# Altium PCB PCB1.PcbDoc
Units mil, origin at the board's own origin, x right, y up, seen from the top; angles counter-clockwise.
Board outline 6000 x 4000 mil, 2 copper layers (Top Layer, Bottom Layer); 38 components, 55 nets, 218 pads, 10 vias.
Unrouted connection lines stored in the file: 1.
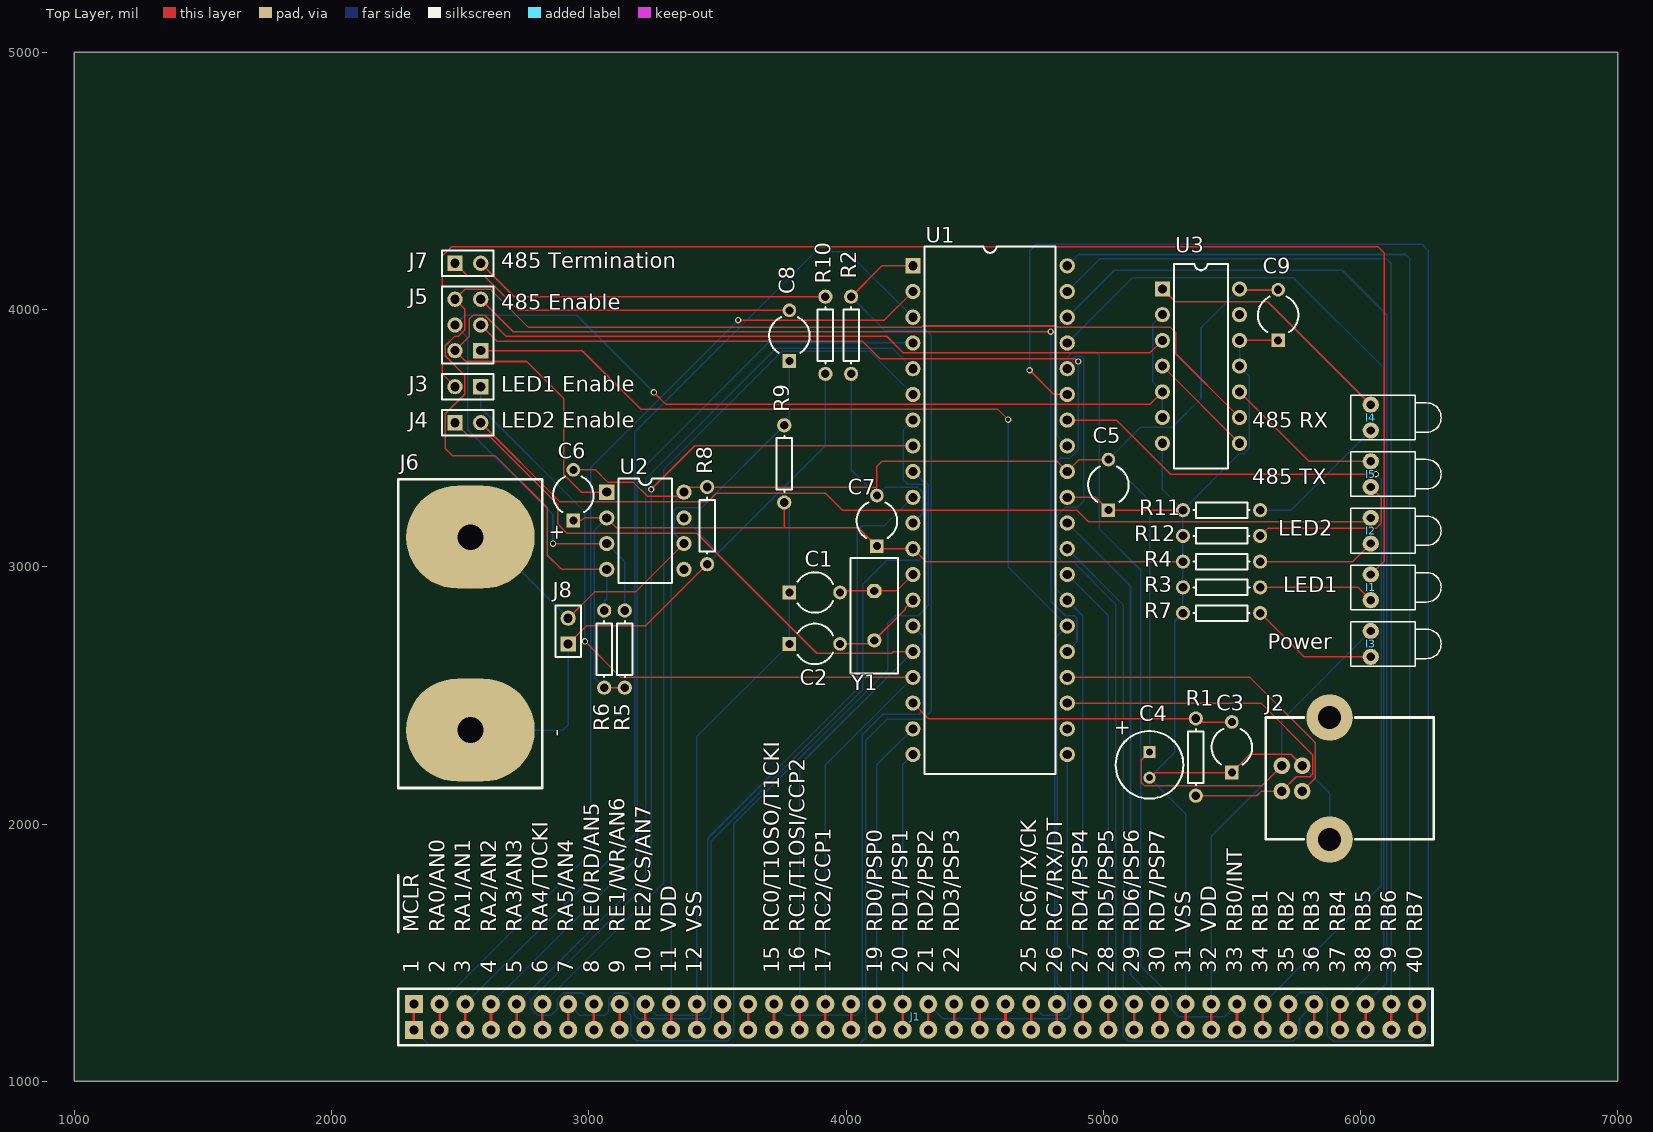
[diagram p0: Top Layer view]
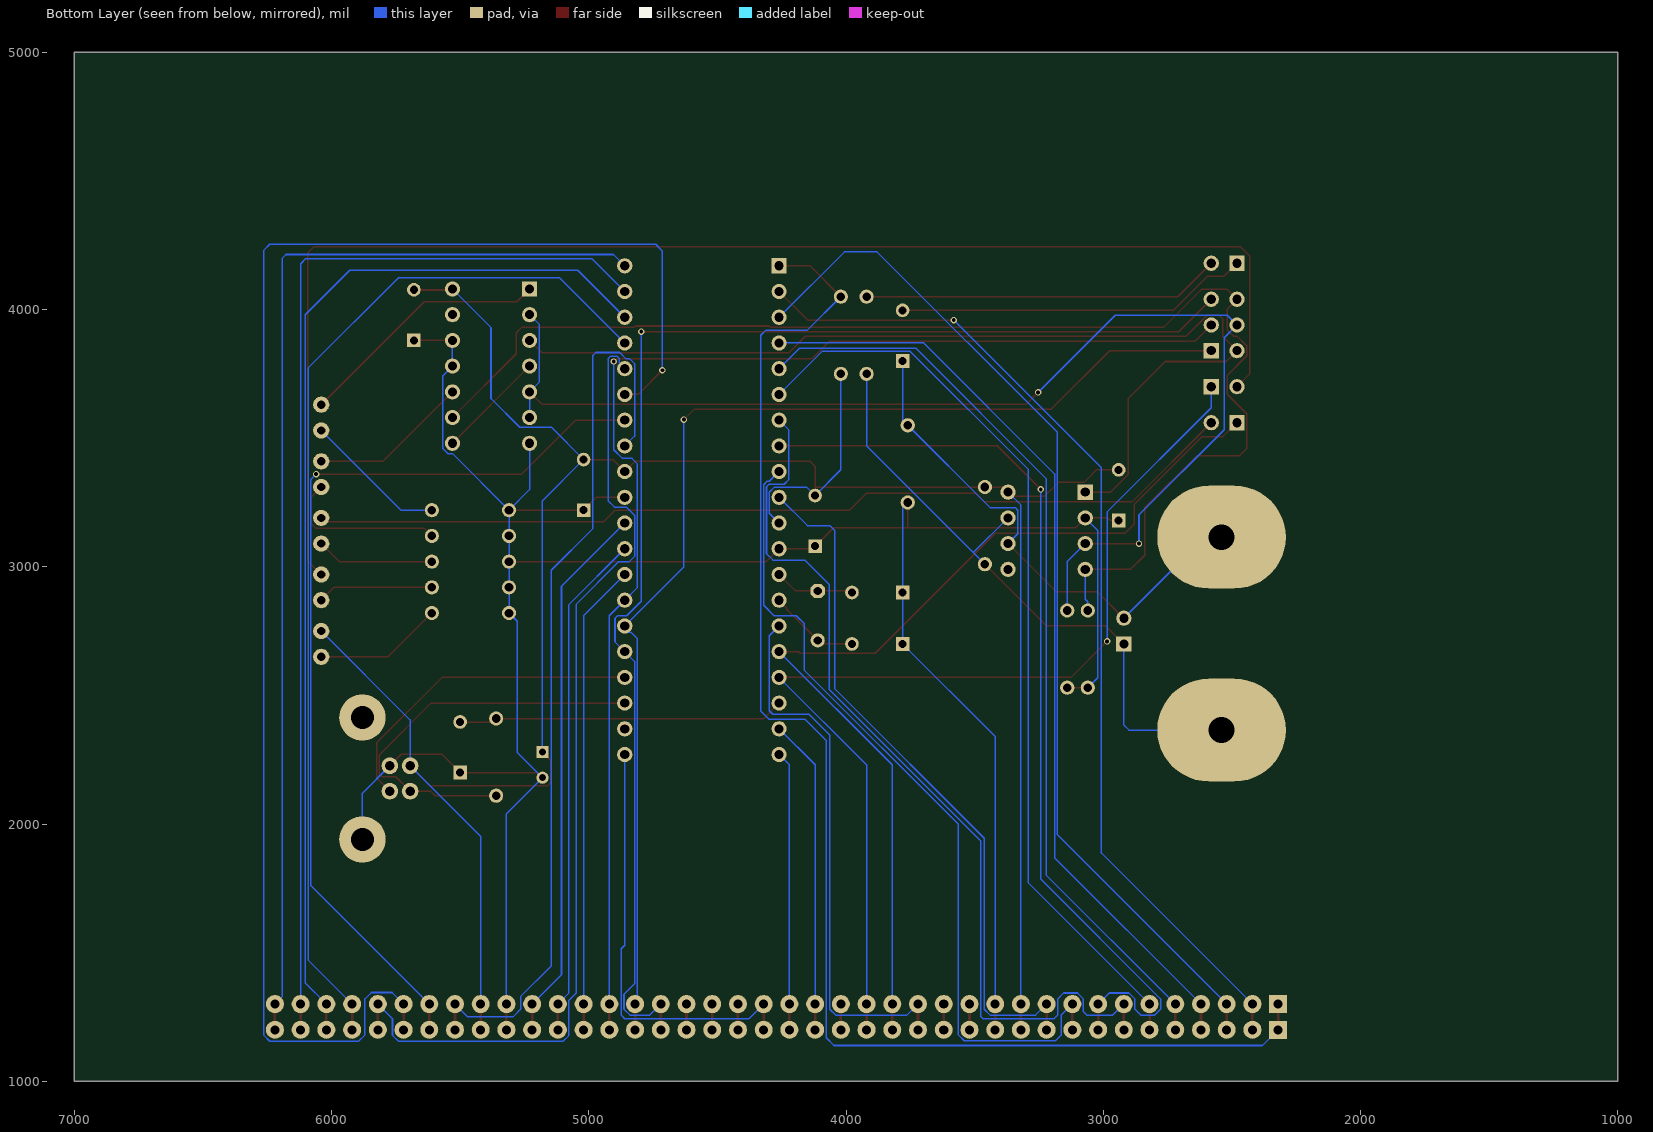
[diagram p1: Bottom Layer view, seen from below]

## Layer stack, top to bottom
Top Layer: signal copper 1.4
Dielectric: dielectric 12.6, FR-4, Dk 4.8
Bottom Layer: signal copper 1.4

## Board outline
1000,1000 7000,1000 7000,5000 1000,5000

## Design rules (kind name [scope] priority, off if disabled: settings)
Clearance [All] p1: gap=5
ComponentClearance [All] p1: gap=10 collisioncheckmode=0
PolygonConnect [All] p1: connectstyle=Relief reliefconductorwidth=10 reliefentries=4 polygonreliefangle="90 Angle"
RoomDefinition Sheet1 [InComponentClass('Sheet1')] p1: confinementstyle=ConfineIn formatcopy=TRUE outline 0,0 2000,0 2000,1000 0,1000
RoutingLayers [All] p1: top layer=Horizontal bottom layer=Vertical
RoutingVias [All] p1: holewidth=15 width=25 viastyle="Through Hole" minholewidth=15 minwidth=25 maxholewidth=15 maxwidth=25
SolderMaskExpansion [All] p1: expansion=4
TestPointUsage [All] p1: valid=0 allowmultiple=FALSE
Testpoint [All] p1: side=15 testpointundercomponent=TRUE minsize=40 maxsize=100 preferedsize=60 minholesize=0 maxholesize=40 preferedholesize=32 testpointgrid=1 style=1023 order=1234567890
Width Width_power [(InNet('VCC') or InNet('GND'))] p1: maxlimit=20 minlimit=10 preferedwidth=10 toplayer_minwidth=20 toplayer_prefwidth=20 bottomlayer_minwidth=20 bottomlayer_prefwidth=20 minimp=50.000000 maximp=50.000000 favimp=50.000000
Width [All] p2: maxlimit=10 minlimit=5 preferedwidth=10 toplayer_maxwidth=6 toplayer_prefwidth=6 bottomlayer_maxwidth=6 bottomlayer_prefwidth=6 minimp=50.000000 maximp=50.000000 favimp=50.000000
16 further rules are at their usual default settings.

## Components (designator, comment, footprint, x,y, rotation, side; value= is the part's Value field where it differs from the comment)
C1 "Cap2" CAPR5-4X5 3780,2900 r0 top
C2 "Cap2" CAPR5-4X5 3780,2700 r0 top
C3 "" CAPR5-4X5 5500,2200 r90 top
C4 "10uF" CAP-EE-1 5180,2380 r90 top
C5 "" CAPR5-4X5 5020,3220 r90 top
C6 "" CAPR5-4X5 2940,3180 r90 top
C7 "" CAPR5-4X5 4120,3080 r90 top
C8 "" CAPR5-4X5 3780,3800 r90 top
C9 "" CAPR5-4X5 5680,3880 r90 top
I1 "LED1" LED-1 6040,2920 r0 top
I2 "LED2" LED-1 6040,3140 r0 top
I3 "Power" LED-1 6040,2700 r0 top
I4 "485 RX" LED-1 6040,3580 r0 top
I5 "485 TX" LED-1 6040,3360 r0 top
J1 "GPIO" HR40 2320,1200 r90 top (schematic designator JP1)
J2 "USB" USB-TYPEB 5880,1940 r90 top (schematic designator J1)
J3 "LED1 Enable" HDR1X2 2580,3700 r180 top
J4 "LED2 Enable" HDR1X2 2480,3560 r0 top
J5 "485 Enable" HDR2X3_NOTEXT 2580,3840 r90 top
J6 "RS-485" RS485J 2540,2740 r90 top
J7 "485 Termination" HDR1X2 2480,4180 r0 top
J8 "RS-485" HDR1X2 2920,2700 r90 top
R1 "Res1" AXIAL-0.3 5360,2260 r270 top
R2 "Res1" AXIAL-0.3 4020,3900 r270 top
R3 "Res1" AXIAL-0.3 5460,2920 r180 top
R4 "Res1" AXIAL-0.3 5460,3020 r180 top
R5 "Res1" AXIAL-0.3 3140,2680 r90 top
R6 "Res1" AXIAL-0.3 3060,2680 r90 top
R7 "" AXIAL-0.3 5460,2820 r180 top
R8 "" AXIAL-0.3 3460,3160 r270 top
R9 "" AXIAL-0.3 3760,3400 r270 top
R10 "" AXIAL-0.3 3920,3900 r270 top
R11 "" AXIAL-0.3 5460,3220 r180 top
R12 "" AXIAL-0.3 5460,3120 r180 top
U1 "PIC16C765" DIP-40 4560,3220 r270 top
U2 "MAX3082E" DIP-8 3220,3140 r270 top
U3 "MM74C02J" DIP-14 5380,3780 r270 top
Y1 "6 MHz" BCY-W2/E4.7 4110,2810 r270 top

## Footprints (in the part's own frame and the unit in brackets; to place one, negate y for a bottom-side part, rotate by r counter-clockwise, add the part's x,y. Pads: shape width x height; smd on the part's side, far side on the other; paste and mask are expansions set on the pad)
AXIAL-0.3 [mm]
  round 1.4 hole 0.85: 1(-3.81,0) 2(3.81,0)
  silkscreen extent -2.77,-0.76 2.77,0.76
BCY-W2/E4.7 [mm]
  oct 1.4x1.4 hole 0.8: 1(-2.44,0)
  round 1.4 hole 0.8: 2(2.44,0)
  silkscreen extent -5.7,-2.35 5.7,2.35
CAP-EE-1 [mm]
  rect 1.2x1.2 hole 0.7: 1(-2.54,0)
  round 1.2 hole 0.7: 2(-5.08,0)
  silkscreen extent -7.15,-3.34 -0.47,3.34
CAPR5-4X5 [mm]
  rect 1.35x1.35 hole 0.8: 1(0,0)
  round 1.35 hole 0.8: 2(5,0)
  silkscreen extent 0.81,-2 4.32,2
DIP-8 [mm]
  rect 1.5x1.5 hole 0.9: 1(-3.81,-3.81)
  round 1.5 hole 0.9: 2(-1.27,-3.81) 3(1.27,-3.81) 4(3.81,-3.81) 5(3.81,3.81) 6(1.27,3.81) 7(-1.27,3.81) 8(-3.81,3.81)
  silkscreen extent -5.15,-2.65 5.15,2.65
DIP-14 [mm]
  rect 1.5x1.5 hole 0.9: 1(-7.62,-3.81)
  round 1.5 hole 0.9: 2(-5.08,-3.81) 3(-2.54,-3.81) 4(0,-3.81) 5(2.54,-3.81) 6(5.08,-3.81) 7(7.62,-3.81) 8(7.62,3.81) 9(5.08,3.81) 10(2.54,3.81) 11(0,3.81) 12(-2.54,3.81) 13(-5.08,3.81) 14(-7.62,3.81)
  silkscreen extent -10.1,-2.65 10.1,2.65
DIP-40 [mm]
  rect 1.5x1.5 hole 0.9: 1(-24.13,-7.62)
  round 1.5 hole 0.9: 2(-21.59,-7.62) 3(-19.05,-7.62) 4(-16.51,-7.62) 5(-13.97,-7.62) 6(-11.43,-7.62) 7(-8.89,-7.62) 8(-6.35,-7.62) 9(-3.81,-7.62) 10(-1.27,-7.62) 11(1.27,-7.62) 12(3.81,-7.62) 13(6.35,-7.62) 14(8.89,-7.62) 15(11.43,-7.62) 16(13.97,-7.62) 17(16.51,-7.62) 18(19.05,-7.62) 19(21.59,-7.62) 20(24.13,-7.62) 21(24.13,7.62) 22(21.59,7.62) 23(19.05,7.62) 24(16.51,7.62) 25(13.97,7.62) 26(11.43,7.62) 27(8.89,7.62) 28(6.35,7.62) 29(3.81,7.62) 30(1.27,7.62) 31(-1.27,7.62) 32(-3.81,7.62) 33(-6.35,7.62) 34(-8.89,7.62) 35(-11.43,7.62) 36(-13.97,7.62) 37(-16.51,7.62) 38(-19.05,7.62) 39(-21.59,7.62) 40(-24.13,7.62)
  silkscreen extent -26.05,-6.45 26.05,6.45
HDR1X2 [mm]
  rect 1.5x1.5 hole 0.9: 1(0,0)
  round 1.5 hole 0.9: 2(2.54,0)
  silkscreen extent -1.27,-1.27 3.81,1.27
HDR2X3_NOTEXT [mm]
  rect 1.5x1.5 hole 0.9: 1(0,0)
  round 1.5 hole 0.9: 2(0,2.54) 3(2.54,0) 4(2.54,2.54) 5(5.08,0) 6(5.08,2.54)
  silkscreen extent -1.27,-1.27 6.35,3.81
HR40 [mil]
  rect 70x70 hole 35: 1(0,0) 1(100,0)
  round 70 hole 35: 2(0,-100) 2(100,-100) 3(0,-200) 3(100,-200) 4(0,-300) 4(100,-300) 5(0,-400) 5(100,-400) 6(0,-500) 6(100,-500) 7(0,-600) 7(100,-600) 8(0,-700) 8(100,-700) 9(0,-800) 9(100,-800) 10(0,-900) 10(100,-900) 11(0,-1000) 11(100,-1000) 12(0,-1100) 12(100,-1100) 13(0,-1200) 13(100,-1200) 14(0,-1300) 14(100,-1300) 15(0,-1400) 15(100,-1400) 16(0,-1500) 16(100,-1500) 17(0,-1600) 17(100,-1600) 18(0,-1700) 18(100,-1700) 19(0,-1800) 19(100,-1800) 20(0,-1900) 20(100,-1900) 21(0,-2000) 21(100,-2000) 22(0,-2100) 22(100,-2100) 23(0,-2200) 23(100,-2200) 24(0,-2300) 24(100,-2300) 25(0,-2400) 25(100,-2400) 26(0,-2500) 26(100,-2500) 27(0,-2600) 27(100,-2600) 28(0,-2700) 28(100,-2700) 29(0,-2800) 29(100,-2800) 30(0,-2900) 30(100,-2900) 31(0,-3000) 31(100,-3000) 32(0,-3100) 32(100,-3100) 33(0,-3200) 33(100,-3200) 34(0,-3300) 34(100,-3300) 35(0,-3400) 35(100,-3400) 36(0,-3500) 36(100,-3500) 37(0,-3600) 37(100,-3600) 38(0,-3700) 38(100,-3700) 39(0,-3800) 39(100,-3800) 40(0,-3900) 40(100,-3900)
  Top Layer lines w10: 0,0 100,0 ; 0,-100 100,-100 ; 0,-200 100,-200 ; 0,-300 100,-300 ; 0,-400 100,-400 ; 0,-500 100,-500 ; 0,-600 100,-600 ; 0,-700 100,-700 ; 0,-800 100,-800 ; 0,-900 100,-900 ; 0,-1000 100,-1000 ; 0,-1200 100,-1200 ; 20,-1200 120,-1200 ; 0,-1400 100,-1400 ; -20,-1900 80,-1900 ; 20,-1900 120,-1900 ; 0,-1600 100,-1600 ; 0,-1600 100,-1600 ; 0,-1600 100,-1600 ; 0,-1600 100,-1600 ; 0,-1600 100,-1600 ; 0,-1700 100,-1700 ; 0,-1700 100,-1700 ; 0,-1700 100,-1700 ; 0,-1700 100,-1700 ; 0,-1700 100,-1700 ; 0,-1800 100,-1800 ; 0,-1800 100,-1800 ; 0,-1800 100,-1800 ; 0,-1800 100,-1800 ; 0,-1900 100,-1900 ; 0,-1900 100,-1900 ; 0,-1900 100,-1900 ; 0,-2000 100,-2000 ; 0,-2000 100,-2000 ; 0,-2000 100,-2000 ; 0,-2000 100,-2000 ; 0,-2100 100,-2100 ; 0,-2100 100,-2100 ; 0,-2100 100,-2100 ; 0,-2100 100,-2100 ; 0,-2200 100,-2200 ; 0,-2200 100,-2200 ; 0,-2200 100,-2200 ; 0,-2200 100,-2200 ; 0,-2300 100,-2300 ; 0,-2300 100,-2300 ; 0,-2300 100,-2300 ; 0,-2400 100,-2400 ; 0,-2400 100,-2400 ; 0,-2400 100,-2400 ; 0,-2500 100,-2500 ; 0,-2500 100,-2500 ; 0,-2500 100,-2500 ; 0,-2500 100,-2500 ; 0,-2500 100,-2500 ; 0,-2600 100,-2600 ; 0,-2600 100,-2600 ; 0,-2600 100,-2600 ; 0,-2600 100,-2600 ; 0,-2700 100,-2700 ; 0,-2700 100,-2700 ; 0,-2700 100,-2700 ; 0,-2700 100,-2700 ; 0,-2800 100,-2800 ; 0,-2800 100,-2800 ; 0,-2800 100,-2800 ; 0,-2800 100,-2800 ; 0,-2900 100,-2900 ; 0,-2900 100,-2900 ; 0,-2900 100,-2900 ; 0,-2900 100,-2900 ; 0,-3000 100,-3000 ; 0,-3000 100,-3000 ; 0,-3000 100,-3000 ; 0,-1100 100,-1100 0,-1100 ; 0,-1300 100,-1300 0,-1300 ; 0,-1500 100,-1500 0,-1500 ; 0,-3100 100,-3100 0,-3100 ; 0,-3200 100,-3200 0,-3200 ; 0,-3300 100,-3300 0,-3300 ; 0,-3400 100,-3400 0,-3400 ; 0,-3500 100,-3500 0,-3500 ; 0,-3600 100,-3600 0,-3600 ; 0,-3700 100,-3700 0,-3700 ; 0,-3800 100,-3800 0,-3800 ; 0,-3900 100,-3900 0,-3900
  silkscreen extent -60,-3960 600,60
LED-1 [mm]
  round 1.6 hole 0.8: 1(0,1.27) 2(0,-1.27)
  silkscreen extent -2,-2.2 6.95,2.2
RS485J [mil]
  oval 400x500 hole 100: 1(-375,0) 2(375,0)
  Top Layer lines w10: 180,0 375,0
  silkscreen extent -600,-280 600,280
USB-TYPEB [mil]
  round 65 hole 36.22: 1(286.22,185.43) 2(187.8,185.43) 3(187.8,106.69) 4(286.22,106.69)
  round 180 hole 90.55: 5(0,0) 5(474.02,0)
  silkscreen extent 0,-406 474,248

## Part data
C1 C2: "Capacitor"
C3 C5 C6 C7 C8 C9: library part Cap2, "Capacitor"
C4: library part "Cap Pol1", "Polarized Capacitor (Radial)"
I1: "Typical RED GaAs LED"
I2 I3 I4 I5: library part LED1, "Typical RED GaAs LED"
J1: library part MHDR2X20, "Header, 20-Pin, Dual row"
J2: library part "USB Type B", "Header, 4-Pin"
J3 J4 J6 J7 J8: library part MHDR1X2, "Header, 2-Pin"
J5: library part MHDR2X3, "Header, 3-Pin, Dual row"
R1 R2 R3 R4 R5 R6: "Resistor"
R7 R8 R9 R10 R11 R12: library part Res1, "Resistor"
U1: "EPROM-Based 8-Bit CMOS Microcontroller with USB"
U2: "+5V-Powered, RS-485 Driver/Receiver"
U3: library part MM74C00J, "Quad 2-Input NAND Gate"
Y1: library part XTAL, "Crystal Oscillator"

## Via types
v1: diameter 25, hole 15, Top Layer to Bottom Layer, 10 vias

## Nets (pads, with @x,y where several pads share a name; then routed paths per layer and width w, separated by ;. In a path a pad name is that pad's centre, name@x,y a point inside that pad or via, vN(x,y) a via of type N, cw(c..) or ccw(c..) an arc to the next point about the centre after c; other vN are vias at no path point)
NetC1_2: C1.2 U1.13 Y1.1 | length 317
  Top Layer w6: C1.2 3976.85,2907 4109.06,2907 Y1.1 4196.06,2906.06 U1.13
NetC2_2: C2.2 U1.14 Y1.2 | length 357.1
  Top Layer w6: C2.2 4096.06,2700 Y1.2 4231,2834.94 4231,2841 U1.14
NetC3_2: C3.2 R1.1 U1.18 | length 1279.2
  Top Layer w6: U1.18 4320,2410 R1.1 5360,2396 5499.15,2396 C3.2
NetC8_1: C8.1 J6.2 J8.2 R9.1 U2.6 | length 2049.3
  Top Layer w6: J8.2 3022,2902 3182,2902 U2.6
  Bottom Layer w6: J6.2 2605,3115 J8.2 ; U2.6 3332,3128 3332,3220 3342,3230 3440,3230 R9.1 3780,3570 C8.1
NetC8_2: C8.2 J7.1 | length 1375.9
  Top Layer w6: J7.1 2530,4130 2594,4130 2727.15,3996.85 C8.2
NetI1_1: I1.1 J3.2 | length 5486.3
  Top Layer w6: J3.2 2431,3749 2431,4209 2466,4244 6068,4244 6092,4220 6092,3022 I1.1
NetI1_2: I1.2 R3.1 | length 450.7
  Top Layer w6: R3.1 5990,2920 I1.2
NetI2_1: I2.1 J4.2 | length 3653.9
  Top Layer w6: J4.2 2888,3252 3462,3252 3496,3286 3920,3286 3986,3220 4898,3220 4943,3175 6025,3175 I2.1
NetI2_2: I2.2 R4.1 | length 459
  Top Layer w6: R4.1 5970,3020 I2.2
NetI3_2: I3.2 R7.1 | length 500.4
  Top Layer w6: R7.1 5780,2650 I3.2
NetI4_1: I4.1 U3.1 | length 996.4
  Top Layer w6: U3.1 5280,4030 5640,4030 I4.1
NetI4_2: I4.2 R11.1 | length 558.4
  Bottom Layer w6: R11.1 5730,3220 I4.2
NetI5_1: I5.1 U3.10 | length 621.8
  Top Layer w6: U3.10 5800,3410 I5.1
NetI5_2: I5.2 R12.1 | length 647.9
  Top Layer w6: R12.1 5639,3149 6060,3149 6080,3169 6080,3270 I5.2
NetJ2_2: J2.2 R1.2 U1.23 | length 1601.1
  Top Layer w6: U1.23 5613,2470 5814,2269 5814,2194 5804,2184 5750.77,2184 J2.2 5615,2127.8 5597.2,2110 R1.2
NetJ2_3: J2.3 U1.24 | length 1279.8
  Top Layer w6: U1.24 5571,2570 5825,2316 5825,2179.49 J2.3
NetJ5_2: J5.2 U2.1 U3.3 | length 3918
  Top Layer w6: U2.1 2972,3290 2902,3360 2902,3655 2759,3798 2522,3798 J5.2 2536,3896 2536,3964 2550,3978 2596,3978 2678,3896 4158,3896 4222,3832 5182,3832 U3.3
NetJ5_4: J5.4 R5.2 U2.3 U3.2 U3.5 U3.6 | length 4867.1
  Top Layer w6: v1(2861,3090) U2.3 ; v1(3253,3678) 3300,3631 5181,3631 U3.5
  Bottom Layer w6: v1(2861,3090) 2861,3202 2530,3533 2530,3890 J5.4 2518,3978 2953,3978 v1(3253,3678) ; U2.3 3140,3020 R5.2 ; U3.6 U3.5 5192,3718 5192,3942 U3.2
NetJ5_6: J5.6 R6.2 U2.4 U3.9 | length 5116.9
  Top Layer w6: U2.4 2894,2990 2839,3045 2839,3229 2637,3431 2471,3431 2442,3460 2442,3595 2518,3671 2518,3744 2442,3820 2442,3859 2480,3897 2495,3897 2518,3920 2518,4002 J5.6 2518,4078 2618,4078 2764,3932 4294,3932 4298,3936 4818,3936 4822,3932 5260,3932 5282,3910 5282,3828 U3.9
  Bottom Layer w6: R6.2 3060,2864 3070,2874 U2.4
NetJ6_1: J6.1 J8.1 R8.2 R10.2 U2.7 | length 2493.1
  Top Layer w6: J8.1 2991,2771 3221,2771 R8.2
  Bottom Layer w6: J6.1 2900,2365 2920,2385 J8.1 ; U2.7 3505,3055 ; R8.2 3505,3055 ; R10.2 3920,3470 3505,3055
NetJ7_2: J7.2 R10.1 | length 1393.8
  Top Layer w6: J7.2 2710,4050 R10.1
NetU3_4: U3.4 U3.8 | length 424.3
  Top Layer w6: U3.4 U3.8
PIN1: J1.1@2320,1200 R2.1 U1.1 | length 5375.8
  Top Layer w6: R2.1 4140,4170 U1.1
  Bottom Layer w6: J1.1@2320,1200 2381,1139 4047,1139 4077,1169 4077,2325 4160,2408 4300,2408 4331,2439 4331,3900 4311,3920 4150,3920 R2.1
PIN2: J1.2@2420,1300 U1.2 | length 3864.9
  Top Layer w6: v1(3581,3959) 4149,3959 U1.2
  Bottom Layer w6: J1.2@2420,1300 3007,1887 3007,3385 v1(3581,3959)
PIN3: J1.3@2520,1300 U1.3 | length 3973.1
  Bottom Layer w6: J1.3@2520,1300 3178,1958 3178,3523 3879,4224 4006,4224 U1.3
PIN4: J1.4@2620,1300 U1.4 | length 3578.5
  Bottom Layer w6: J1.4@2620,1300 3189,1869 3189,3361 3698,3870 U1.4
PIN5: J1.5@2720,1300 U1.5 | length 3532.1
  Bottom Layer w6: J1.5@2720,1300 3222,1802 3222,3343 3729,3850 4180,3850 U1.5
PIN6: J1.6@2820,1300 U1.6 | length 3501.4
  Bottom Layer w6: J1.6@2820,1300 3291,1771 3291,3378 3750,3837 4093,3837 U1.6
PIN7: J1.7@2920,1300 U1.7 | length 3542.8
  Bottom Layer w6: J1.7@2920,1300 2963,1257 3064,1257 3077,1270 3077,1320 3100,1343 3154,1343 3177,1320 3177,1257 3191,1243 3467,1243 3477,1253 3477,1935 4066,2524 4066,2932 4160,3026 4284,3026 4309,3051 4309,3311 4299,3321 4240,3321 4222,3339 4222,3532 U1.7
PIN8: J1.8@3020,1300 U1.8 | length 3630.4
  Top Layer w6: v1(3243,3301) 3412,3470 U1.8
  Bottom Layer w6: J1.8@3020,1300 2977,1343 2900,1343 2877,1320 2877,1280 2854,1257 2800,1257 2777,1280 2777,1320 3243,1786 v1(3243,3301)
PIN9: J1.9@3120,1300 U1.9 | length 3141.5
  Bottom Layer w6: J1.9@3120,1300 3163,1257 3163,1180 3186,1157 3540,1157 3563,1180 3563,1999 4163,2599 4163,2780 4193,2810 4280,2810 4320,2850 4320,3319 4307,3332 4298,3332 U1.9
PIN10: J1.10@3220,1300 U1.10 | length 2641.4
  Bottom Layer w6: J1.10@3220,1300 3263,1257 3440,1257 3463,1280 3463,1945 4043,2525 4043,3140 4063,3160 4150,3160 U1.10
PIN11: C4.1 C5.2 C6.2 C7.2 C9.2 I3.1 J1.11@3320,1300 J1.32@5420,1300 J2.1 R2.2 R8.1 U1.11 U1.32 U2.8 U3.14 | length 9902.5
  Top Layer w6: C6.2 3026,3376.85 3074.85,3328 3174,3328 3228,3274 3348,3274 3348,3290 U2.8 3370,3310 R8.1 4120,3310 ; C7.2 4120,3310 ; C5.2 4906.85,3416.85 U1.32 4820,3410 4140,3410 4120,3390 4120,3310 ; C4.1 5148,2248 5148,2160 5160,2148 5616.34,2148 J2.1 ; U3.14 5534,4076 5679.15,4076 C9.2
  Bottom Layer w6: J1.11@3320,1300 3320,3240 U2.8 ; R2.2 4020,3376.85 C7.2 4153.15,3310 4278,3310 4298,3290 4298,3208 U1.11 ; C4.1 5180,3256.85 C5.2 5145.15,3542 5268,3542 5380,3654 5380,3930 U3.14 ; J1.32@5420,1300 5420,1951.66 J2.1 5694.57,2404.57 I3.1
PIN12: C1.1 C2.1 C3.1 C4.2 C5.1 C6.1 C7.1 C9.1 J1.12@3420,1300 J1.31@5320,1300 J2.4 J2.5@5880,1940 R3.2 R4.2 R5.1 R6.1 R7.2 R9.2 R11.2 R12.2 U1.12 U1.31 U2.2 U3.7 U3.11 U3.12 | length 10151.1
  Top Layer w6: C6.1 2972,3180 2982,3190 U2.2 3108,3152 3760,3152 ; R6.1 R5.1 ; R9.2 3760,3152 ; U1.31 4970,3270 C5.1 R11.2 ; C4.2 5200,2200 C3.1 5571,2271 5728.53,2271 J2.4 ; R4.2 4310,3020 U1.12 4120,3070 C7.1 4048,3152 3760,3152 ; U3.12 C9.1
  Bottom Layer w6: R6.1 3021,2569 3021,3141 U2.2 ; J1.12@3420,1300 3420,2340 C2.1 C1.1 3780,3230 R9.2 ; U3.7 5230,3300 R11.2 ; J1.31@5320,1300 5320,2040 C4.2 5278,2278 5278,2788 R7.2 R3.2 R4.2 R12.2 R11.2 ; U3.12 U3.11 5568,3742 5568,3460 5548,3440 5530,3440 R11.2 ; J2.4 5880,2119.53 J2.5@5880,1940
PIN15: J1.15@3720,1300 U1.15 | length 2056
  Bottom Layer w6: J1.15@3720,1300 3763,1257 4040,1257 4063,1280 4063,2346 4144,2427 4285,2427 4298,2440 4298,2732 U1.15
PIN16: J1.16@3820,1300 J4.1 U1.16 | length 3750.4
  Top Layer w6: J4.1 2534,3506 2615,3506 2880,3241 2880,3165 2915,3130 3420,3130 3886,2664 4178,2664 4184,2670 U1.16
  Bottom Layer w6: J1.16@3820,1300 3820,2230 U1.16
PIN17: J1.17@3920,1300 J3.1 U1.17 | length 3901.6
  Top Layer w6: v1(2985,2710) 3125,2570 U1.17
  Bottom Layer w6: J3.1 2580,3618 2985,3213 v1(2985,2710) ; J1.17@3920,1300 3920,2230 U1.17
PIN19: J1.19@4120,1300 U1.19 | length 1128
  Bottom Layer w6: J1.19@4120,1300 4120,2230 U1.19
PIN20: J1.20@4220,1300 U1.20 | length 986.6
  Bottom Layer w6: J1.20@4220,1300 4220,2230 U1.20
PIN21: J1.21@4320,1300 U1.21 | length 1602.2
  Bottom Layer w6: J1.21@4320,1300 4377,1243 4860,1243 4874,1257 4874,1515 4860,1529 U1.21
PIN22: J1.22@4420,1300 U1.22
PIN25: J1.25@4720,1300 J5.5 U1.25 | length 5184.3
  Top Layer w6: J5.5 2706,3914 v1(4796,3914)
  Bottom Layer w6: J1.25@4720,1300 4763,1257 4840,1257 4863,1280 4863,1338 4822,1379 4822,2632 U1.25 4898,2708 4898,2800 4888,2810 4852,2810 4796,2866 v1(4796,3914)
PIN26: J1.26@4820,1300 J5.1 U1.26 | length 4565.8
  Top Layer w6: J5.1 2975,3840 3202,3613 4589,3613 v1(4630,3572)
  Bottom Layer w6: v1(4630,3572) 4630,3000 U1.26 4860,2746 4837,2746 4811,2720 4811,1309 J1.26@4820,1300
PIN27: J1.27@4920,1300 J5.3 U1.27 | length 4984.7
  Top Layer w6: J5.3 2643,3877 4064,3877 4133,3808 4893,3808 v1(4903,3798)
  Bottom Layer w6: v1(4903,3798) 4903,3455 4869,3421 4832,3421 4811,3400 4811,2919 U1.27 4920,2810 J1.27@4920,1300
PIN28: J1.28@5020,1300 U1.28 | length 1736.3
  Bottom Layer w6: U1.28 5020,2810 J1.28@5020,1300
PIN29: J1.29@5120,1300 U1.29 | length 1877.7
  Bottom Layer w6: U1.29 5077,2853 5077,1343 J1.29@5120,1300
PIN30: J1.30@5220,1300 U1.30 | length 2019.1
  Bottom Layer w6: U1.30 5106,2924 5106,1414 J1.30@5220,1300
PIN33: J1.33@5520,1300 U1.33 | length 3466.1
  Bottom Layer w6: U1.33 4822,3508 4822,3790 4840,3808 4855,3808 4880,3833 4972,3833 4985,3820 4985,3147 5146,2986 5146,1448 5265,1329 5265,1280 5295,1250 5470,1250 J1.33@5520,1300
PIN34: J1.34@5620,1300 U1.34 | length 3545.8
  Top Layer w6: U1.34 5052,3570 5262,3360 v1(6060,3360)
  Bottom Layer w6: J1.34@5620,1300 6080,1760 6080,3340 v1(6060,3360)
PIN35: J1.35@5720,1300 U1.35 | length 6003.1
  Top Layer w6: v1(4714,3764) 4808,3670 U1.35
  Bottom Layer w6: v1(4714,3764) 4714,4228 4740,4254 6240,4254 6263,4231 6263,1178 6240,1155 5895,1155 5870,1180 5870,1320 5845,1345 5765,1345 J1.35@5720,1300
PIN36: J1.36@5820,1300 U1.36 | length 3780.7
  Bottom Layer w6: U1.36 4882,3792 4882,3811 4890,3819 4915,3819 4924,3810 4924,3256 4900,3232 4854,3232 4822,3200 4822,3040 4842,3020 4883,3020 5048,2855 5048,1344 5077,1315 5077,1178 5100,1155 5740,1155 5763,1178 5763,1243 J1.36@5820,1300
PIN37: J1.37@5920,1300 U1.37 | length 4025.4
  Bottom Layer w6: U1.37 5114,4124 5740,4124 6091,3773 6091,1471 J1.37@5920,1300
PIN38: J1.38@6020,1300 U1.38 | length 4103.4
  Bottom Layer w6: U1.38 5043,4153 5929,4153 6102,3980 6102,1382 J1.38@6020,1300
PIN39: J1.39@6120,1300 U1.39 | length 4199.3
  Bottom Layer w6: U1.39 4988,4198 6100,4198 6120,4178 J1.39@6120,1300
PIN40: J1.40@6220,1300 U1.40 | length 4267
  Bottom Layer w6: U1.40 4904,4214 6177,4214 6191,4200 6191,1329 J1.40@6220,1300
pads on no net: J1.1@2320,1300 J1.2@2420,1200 J1.3@2520,1200 J1.4@2620,1200 J1.5@2720,1200 J1.6@2820,1200 J1.7@2920,1200 J1.8@3020,1200 J1.9@3120,1200 J1.10@3220,1200 J1.11@3320,1200 J1.12@3420,1200 J1.13 J1.14 J1.15@3720,1200 J1.16@3820,1200 J1.17@3920,1200 J1.18 J1.19@4120,1200 J1.20@4220,1200 J1.21@4320,1200 J1.22@4420,1200 J1.23 J1.24 J1.25@4720,1200 J1.26@4820,1200 J1.27@4920,1200 J1.28@5020,1200 J1.29@5120,1200 J1.30@5220,1200 J1.31@5320,1200 J1.32@5420,1200 J1.33@5520,1200 J1.34@5620,1200 J1.35@5720,1200 J1.36@5820,1200 J1.37@5920,1200 J1.38@6020,1200 J1.39@6120,1200 J1.40@6220,1200 J2.5@5880,2414.02 U2.5 U3.13

## Text inside footprints (layer, text, board x,y; h text height)
C4: Top Overlay "+" at 5100,2340 h59.06 r90
J1: Top Overlay "36" at 5840,1420 h60 r90; Top Overlay "40" at 6240,1420 h60 r90; Top Overlay "39" at 6140,1420 h60 r90; Top Overlay "38" at 6040,1420 h60 r90; Top Overlay "37" at 5940,1420 h60 r90; Top Overlay "35" at 5740,1420 h60 r90; Top Overlay "34" at 5640,1420 h60 r90; Top Overlay "33" at 5540,1420 h60 r90; Top Overlay "32" at 5440,1420 h60 r90; Top Overlay "31" at 5340,1420 h60 r90; Top Overlay "30" at 5240,1420 h60 r90; Top Overlay "29" at 5140,1420 h60 r90; Top Overlay "28" at 5040,1420 h60 r90; Top Overlay "27" at 4940,1420 h60 r90; Top Overlay "26" at 4840,1420 h60 r90; Top Overlay "25" at 4740,1420 h60 r90; Top Overlay "22" at 4440,1420 h60 r90; Top Overlay "21" at 4340,1420 h60 r90; Top Overlay "20" at 4240,1420 h60 r90; Top Overlay "19" at 4140,1420 h60 r90; Top Overlay "17" at 3940,1420 h60 r90; Top Overlay "15" at 3740,1420 h60 r90; Top Overlay "16" at 3840,1420 h60 r90; Top Overlay "12" at 3440,1420 h60 r90; Top Overlay "11" at 3340,1420 h60 r90; Top Overlay "10" at 3240,1420 h60 r90; Top Overlay "9" at 3140,1420 h60 r90; Top Overlay "8" at 3040,1420 h60 r90; Top Overlay "7" at 2940,1420 h60 r90; Top Overlay "6" at 2840,1420 h60 r90; Top Overlay "5" at 2740,1420 h60 r90; Top Overlay "4" at 2640,1420 h60 r90; Top Overlay "3" at 2540,1420 h60 r90; Top Overlay "2" at 2440,1420 h60 r90; Top Overlay "1" at 2340,1420 h60 r90; Top Overlay "RB3" at 5840,1580 h60 r90; Top Overlay "RB7" at 6240,1580 h60 r90; Top Overlay "RB6" at 6140,1580 h60 r90; Top Overlay "RB5" at 6040,1580 h60 r90; Top Overlay "RB4" at 5940,1580 h60 r90; Top Overlay "RB2" at 5740,1580 h60 r90; Top Overlay "RB1" at 5640,1580 h60 r90; Top Overlay "RB0/INT" at 5540,1580 h60 r90; Top Overlay "VDD" at 5440,1580 h60 r90; Top Overlay "VSS" at 5340,1580 h60 r90; Top Overlay "RD7/PSP7" at 5240,1580 h60 r90; Top Overlay "RD6/PSP6" at 5140,1580 h60 r90; Top Overlay "RD5/PSP5" at 5040,1580 h60 r90; Top Overlay "RD4/PSP4" at 4940,1580 h60 r90; Top Overlay "RC7/RX/DT" at 4840,1580 h60 r90; Top Overlay "RC6/TX/CK" at 4740,1580 h60 r90; Top Overlay "RD3/PSP3" at 4440,1580 h60 r90; Top Overlay "RD2/PSP2" at 4340,1580 h60 r90; Top Overlay "RD1/PSP1" at 4240,1580 h60 r90; Top Overlay "RD0/PSP0" at 4140,1580 h60 r90; Top Overlay "RC2/CCP1" at 3940,1580 h60 r90; Top Overlay "RC0/T1OSO/T1CKI" at 3740,1580 h60 r90; Top Overlay "VSS" at 3440,1580 h60 r90; Top Overlay "VDD" at 3340,1580 h60 r90; Top Overlay "RE2/CS/AN7" at 3240,1580 h60 r90; Top Overlay "RE1/WR/AN6" at 3140,1580 h60 r90; Top Overlay "RE0/RD/AN5" at 3040,1580 h60 r90; Top Overlay "RA5/AN4" at 2940,1580 h60 r90; Top Overlay "RA4/T0CKI" at 2840,1580 h60 r90; Top Overlay "RA3/AN3" at 2740,1580 h60 r90; Top Overlay "RA2/AN2" at 2640,1580 h60 r90; Top Overlay "RA1/AN1" at 2540,1580 h60 r90; Top Overlay "RA0/AN0" at 2440,1580 h60 r90; Top Overlay "MCLR" at 2340,1580 h60 r90; Top Overlay "RC1/T1OSI/CCP2" at 3840,1580 h60 r90
J6: Top Overlay "-" at 2900,2340 h60 r90; Top Overlay "+" at 2900,3100 h60 r90